# EAGLE board FLHSFYCIZ6BVKJ1 (EAGLE 7.6.0)
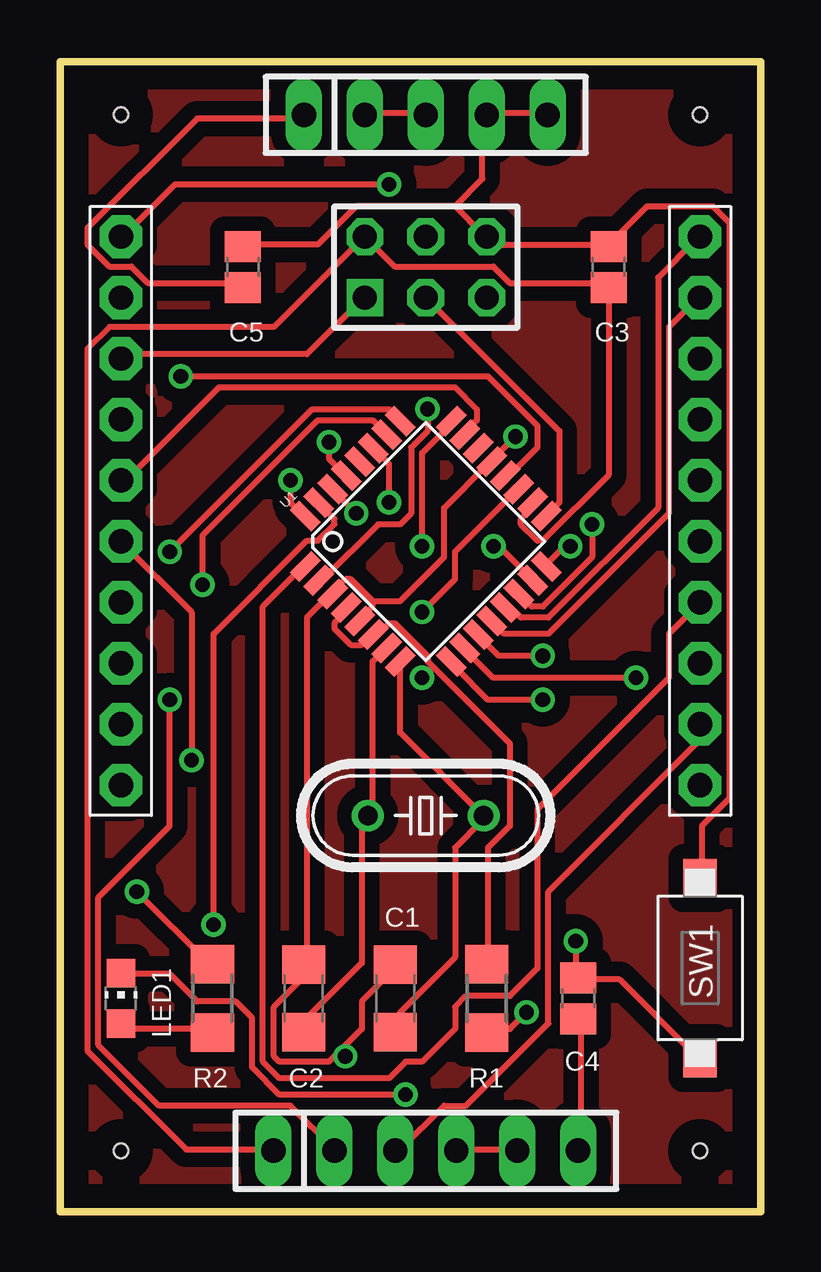
[diagram p0: board, top side]
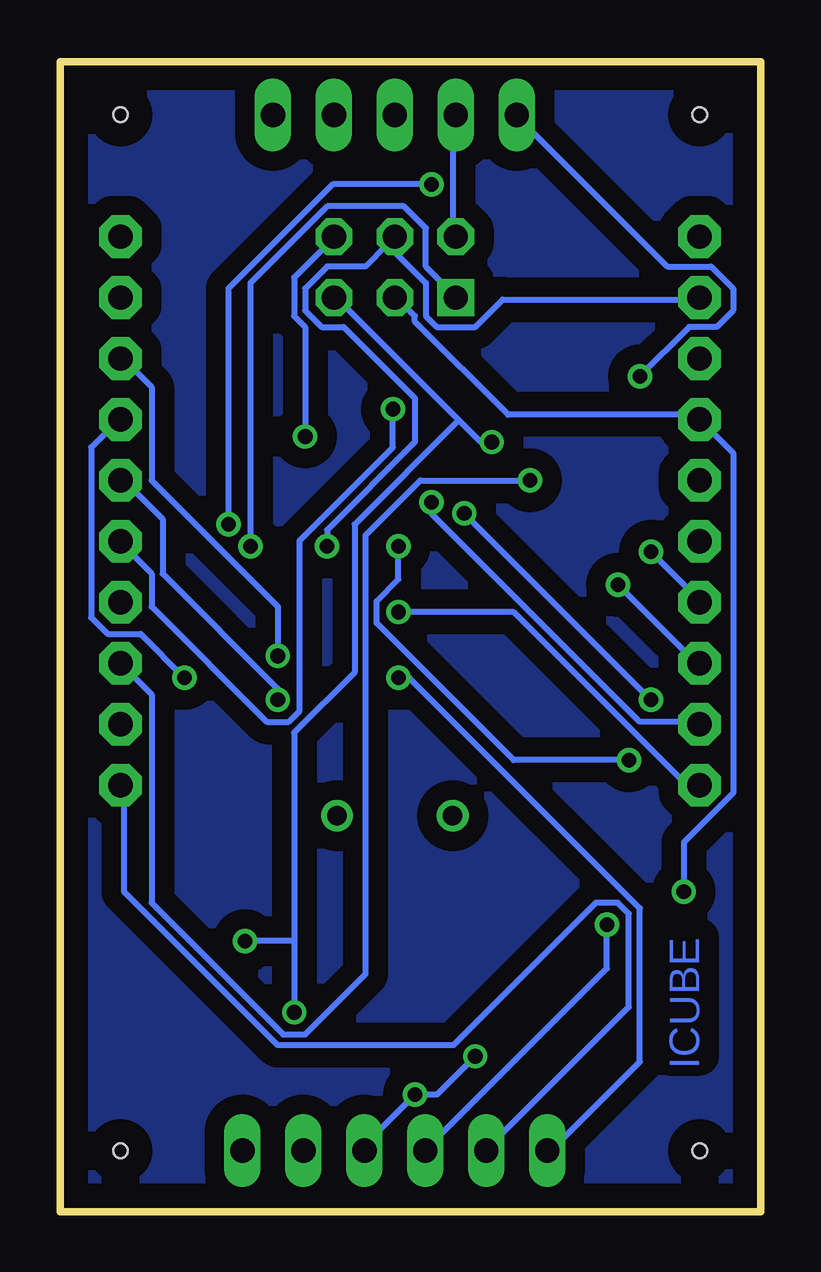
[diagram p1: board, bottom side, seen from below]

Size 29.19 x 47.93 mm. Coordinates in mm from the lower left corner, seen from the top.
Outline: 0,0 29.19,0 29.19,47.93 0,47.93 0,0
Copper layers (1*16): Top 0.035mm / dielectric 1.5mm / Bottom 0.035mm
Design rules "default": minimum track width 10mil, minimum drill 24mil, track to track 8mil, track to pad 8mil, pad to pad 8mil, via to via 8mil, smd to smd 8mil, copper to edge 40mil, drill to drill 8mil, minimum pad ring 10mil, minimum via ring 8mil, stop-mask expansion 4mil, vias tented up to drill 0mil, thermal gap 10mil
Holes 0.6 mm at 2.54,45.72 26.67,45.72 26.67,2.54 2.54,2.54

## Footprints (pad centres in the part's own frame; a part is rotated, then mirrored left to right if it is on the bottom)
C1206 = smd 1.6 x 1.8: 1 -1.4,0; 2 1.4,0
C0805 = smd 1.3 x 1.5: 1 -0.85,0; 2 0.85,0
SIP-100-6V = drill 1.016 long: 1 -6.35,0; 2 -3.81,0; 3 -1.27,0; 4 1.27,0; 5 3.81,0; 6 6.35,0
SIP-100-5V = drill 1.016 long: 1 -5.08,0; 2 -2.54,0; 3 0,0; 4 2.54,0; 5 5.08,0
AVR-ISP-6 = drill 1.016 square: 1 -2.54,-1.27 | drill 1.016 octagon: 2 -2.54,1.27; 3 0,-1.27; 4 0,1.27; 5 2.54,-1.27; 6 2.54,1.27
CHIP-LED0805 = smd 1.2 x 1.2: A 0,-1.05; C 0,1.05
HC49/S = drill 0.813: 1 -2.413,0; 2 2.413,0
R1206 = smd 1.6 x 1.803: 1 -1.422,0; 2 1.422,0
KSS-2EG4430 = smd 1.6 x 1.4: 1 -3.75,0; 2 3.75,0
TQFP32-08 = smd 1.27 x 0.559: 1 -4.293,2.8; 2 -4.293,2; 3 -4.293,1.2; 4 -4.293,0.4; 5 -4.293,-0.4; 6 -4.293,-1.2; 7 -4.293,-2; 8 -4.293,-2.8; 17 4.293,-2.8; 18 4.293,-2; 19 4.293,-1.2; 20 4.293,-0.4; 21 4.293,0.4; 22 4.293,1.2; 23 4.293,2; 24 4.293,2.8 | smd 0.559 x 1.27: 9 -2.8,-4.293; 10 -2,-4.293; 11 -1.2,-4.293; 12 -0.4,-4.293; 13 0.4,-4.293; 14 1.2,-4.293; 15 2,-4.293; 16 2.8,-4.293; 25 2.8,4.293; 26 2,4.293; 27 1.2,4.293; 28 0.4,4.293; 29 -0.4,4.293; 30 -1.2,4.293; 31 -2,4.293; 32 -2.8,4.293
1X10-BIG = drill 1.016 pad 1.778 octagon: 1 -11.43,0; 2 -8.89,0; 3 -6.35,0; 4 -3.81,0; 5 -1.27,0; 6 1.27,0; 7 3.81,0; 8 6.35,0; 9 8.89,0; 10 11.43,0

## Placement (x,y rotation side)
C1  22pF  [C1206]  13.97,8.89 90 top
C2  22pF  [C1206]  10.16,8.89 90 top
C3  0.1uF  [C0805]  22.86,39.37 90 top
C4  0.1uF  [C0805]  21.59,8.89 90 top
C5  0.1uF  [C0805]  7.62,39.37 90 top
CN1  [SIP-100-6V]  15.24,2.54 0 top
CN2  [SIP-100-5V]  15.24,45.72 0 top
JP1  AVR-ISP-6  [AVR-ISP-6]  15.24,39.37 0 top
LED1  Yellow  [CHIP-LED0805]  2.54,8.89 0 top
Q1  16MHz  [HC49/S]  15.24,16.51 180 top
R1  10K  [R1206]  17.78,8.89 90 top
R2  1K  [R1206]  6.35,8.89 90 top
SW1  KSS-2EG4430  [KSS-2EG4430]  26.67,10.16 270 top
U1  ATMEGA328  [TQFP32-08]  15.24,27.94 45 top
U$1  PINHD-1X10  [1X10-BIG]  26.67,29.21 90 top
U$2  PINHD-1X10  [1X10-BIG]  2.54,29.21 270 top

## Library data of the parts
C1-C5 LED1 R1 R2 U$1 U$2 = adafruit
CN1 CN2 = con-hdrs40
JP1 = atmel-1
Q1 = crystal
SW1 = buttons
U1 = thecustomgeek

## Nets
A0: U1.23 U$2.5
A1: U1.24 U$2.6
A2: U1.25 U$2.7
A3: U1.26 U$2.8
A4: U1.27 U$2.9
A5: U1.28
A6: U1.19 U$2.10
A7: U1.22
AREF: C5.1 CN2.1 U1.20
D0: CN1.2 U1.30 U$1.1
D1: CN1.3 U1.31 U$1.2
D2: U1.32 U$1.3
D3: U1.1 U$1.4
D4: U1.2 U$1.5
D5: U1.9 U$1.6
D6: U1.10 U$1.7
D7: U1.11 U$1.8
D8: U1.12 U$1.9
D9: U1.13 U$1.10
D10: U1.14 U$2.1
D11: JP1.4 U1.15 U$2.2
D12: JP1.1 U1.16 U$2.3
D13: JP1.3 R2.2 U1.17 U$2.4
GND: C1.2 C2.2 C3.2 C5.2 CN1.4 CN1.5 CN2.4 CN2.5 JP1.6 LED1.C SW1.1 U1.3 U1.5 U1.21
N$6: C4.1 CN1.6
N$43: C2.1 Q1.2 U1.7
N$44: C1.1 Q1.1 U1.8
N$50: LED1.A R2.1
RST: C4.2 JP1.5 R1.1 SW1.2 U1.29
VCC: C3.1 CN1.1 CN2.2 CN2.3 JP1.2 R1.2 U1.4 U1.6 U1.18

## Tracks (layer width: path | path; a pad name or v marks a point on that pad's centre or on a via)
A0
  Top 0.254: U1.23 16.92,32.54 17.37,32.99 17.37,33.45 16.46,34.37 6.63,34.37 2.74,30.48 U$2.5
A1  (via drill 0.61)
  Top 0.254: v15.09,27.74 15.09,31.62 16.23,32.77 U1.24 | v5.49,18.82 5.49,24.99 U$2.6
  Bottom 0.254: v15.09,27.74 15.09,26.37 16,25.45 16,24.54 10.29,18.82 v5.49,18.82
A2  (via drill 0.61)
  Top 0.254: v4.57,27.51 10.52,33.45 13.72,33.45 14.17,32.99 U1.25
  Bottom 0.254: v4.57,27.51 2.52,25.45 U$2.7
A3  (via drill 0.61)
  Top 0.254: v5.94,26.14 5.94,28.19 10.74,32.99 13.03,32.99 13.49,32.54 U1.26
  Bottom 0.254: v5.94,26.14 2.74,22.94 U$2.8
A4  (via drill 0.61)
  Top 0.254: v13.72,29.57 13.72,31.17 13.26,31.62 U1.27
  Bottom 0.254: v13.72,29.57 13.72,29.11 5.03,20.42 2.74,20.42 U$2.9
A6  (via drill 0.61)
  Top 0.254: v15.09,24.99 16.46,26.37 16.46,27.51 18.97,30.02 U1.19
  Bottom 0.254: v15.09,24.99 10.29,24.99 3.2,17.91 2.74,17.91 U$2.10
AREF  (via drill 0.61)
  Top 0.254: v5.03,34.82 17.83,34.82 19.89,32.77 19.89,31.85 18.75,30.71 U1.20 | C5.1 7.54,38.71 3.66,38.71 2.97,39.39 2.06,39.39 1.14,40.31 1.14,41 5.71,45.57 10.06,45.57 CN2.1
  Bottom 0.254: v5.03,34.82 2.97,36.88 1.83,36.88 1.14,37.57 1.14,38.48 2.06,39.39 3.89,39.39 10.06,45.57 CN2.1
D0  (via drill 0.61)
  Top 0.254: v12.34,29.11 11.43,30.02 U1.30 | v4.57,21.34 4.57,16.08 1.6,13.11 1.6,6.93 4.12,4.42 9.6,4.42 11.43,2.59 CN1.2
  Bottom 0.254: v4.57,21.34 v12.34,29.11 | U$1.1 26.52,17.68 26.52,13.33 20.12,6.93 12.8,6.93 6.86,12.88 5.94,12.88 5.49,12.42 5.49,8.53 11.43,2.59 CN1.2
D1  (via drill 0.61)
  Top 0.254: v6.4,11.96 6.4,24.08 10.29,27.96 10.74,27.96 11.43,28.65 11.43,28.88 10.97,29.34 U1.31 | U$1.2 26.52,20.19 26.52,19.51 20.34,13.33 20.34,7.85 16.92,4.42 16,4.42 14.17,2.59 CN1.3
  Bottom 0.254: v6.4,11.96 6.4,10.13 13.95,2.59 CN1.3
D2  (via drill 0.61)
  Top 0.254: v9.6,30.48 9.6,29.57 10.06,29.11 U1.32
  Bottom 0.254: v9.6,30.48 14.17,30.48 16.46,28.19 16.46,9.91 18.97,7.39 19.89,7.39 25.38,12.88 25.38,21.57 U$1.3
D3
  Top 0.254: U1.1 10.06,26.82 8.46,25.22 8.46,6.25 9.14,5.56 13.72,5.56 14.4,6.25 15.09,6.25 16.46,7.62 16.46,8.53 16.92,8.99 18.75,8.99 19.89,10.13 19.89,16.76 25.38,22.25 25.38,24.08 26.52,25.22 U$1.4
D4  (via drill 0.61)
  Top 0.254: v15.32,33.45 15.32,32.54 14.63,31.85 14.63,29.11 14.17,28.65 13.26,28.65 10.97,26.37 U1.2
  Bottom 0.254: v15.32,33.45 15.32,31.85 19.2,27.96 19.2,20.88 19.66,20.42 20.57,20.42 25.38,25.22 25.38,26.59 26.52,27.74 U$1.5
D5  (via drill 0.61)
  Top 0.254: v20.12,21.34 17.83,21.34 16.46,22.71 U1.9
  Bottom 0.254: v20.12,21.34 20.12,21.79 24.92,26.59 24.92,28.88 26.52,30.48 U$1.6
D6  (via drill 0.61)
  Top 0.254: v24,22.25 18.06,22.25 16.92,23.39 U1.10
  Bottom 0.254: v24,22.25 25.83,24.08 27.2,24.08 27.89,24.77 27.89,31.85 26.75,32.99 U$1.7
D7  (via drill 0.61)
  Top 0.254: v20.12,23.17 18.29,23.17 17.6,23.85 U1.11
  Bottom 0.254: v20.12,23.17 20.12,25.22 25.38,30.48 25.38,34.37 26.52,35.51 U$1.8
D8
  Top 0.254: U1.12 18.06,24.54 18.52,24.08 20.34,24.08 25.38,29.11 25.38,36.88 26.52,38.02 U$1.9
D9
  Top 0.254: U1.13 18.75,24.99 18.97,24.99 19.2,24.77 20.34,24.77 24.92,29.34 24.92,38.94 26.52,40.54 U$1.10
D10  (via drill 0.61)
  Top 0.254: v22.17,28.65 22.17,27.28 20.12,25.22 19.66,25.22 19.2,25.68 U1.14 | v13.72,42.82 4.8,42.82 2.74,40.77 U$2.1
  Bottom 0.254: v22.17,28.65 22.17,38.48 17.83,42.82 v13.72,42.82
D11  (via drill 0.61)
  Top 0.254: v18.06,27.74 18.29,27.74 19.66,26.37 U1.15
  Bottom 0.254: v18.06,27.74 18.06,28.42 14.4,32.08 14.4,33.91 17.37,36.88 18.29,36.88 18.97,37.57 18.97,38.48 18.06,39.39 16.46,39.39 15.54,40.31 | 15.54,40.31 15.32,40.54 JP1.4 15.54,40.31 | 15.54,40.31 13.95,38.71 13.95,37.34 13.49,36.88 11.89,36.88 10.74,38.02 2.74,38.02 U$2.2
D12  (via drill 0.61)
  Top 0.254: v21.26,27.74 21.03,27.74 20.34,27.05 U1.16 | U$2.3 2.74,35.74 10.29,35.74 12.57,38.02 JP1.1
  Bottom 0.254: v21.26,27.74 21.26,38.71 18.06,41.91 14.86,41.91 13.95,41 13.95,39.39 12.8,38.25 JP1.1
D13  (via drill 0.61)
  Top 0.254: JP1.3 20.8,32.54 20.8,29.57 20.34,29.11 U1.17 | v3.2,13.33 6.17,10.36 R2.2
  Bottom 0.254: v3.2,13.33 3.2,15.39 1.14,17.45 1.14,31.62 U$2.4 2.74,33.22 10.52,33.22 14.4,37.11 14.4,37.34 15.09,38.02 JP1.3
GND  (via drill 0.61)
  Top 0.254: v14.4,4.88 9.14,4.88 8,6.02 8,8.08 7.32,8.76 5.71,8.76 4.57,9.91 2.74,9.91 LED1.C | CN1.5 18.97,2.59 16.69,2.59 CN1.4 | 11.66,6.71 12.57,7.62 12.57,8.76 13.95,10.13 C1.2 | 11.66,6.71 11.2,6.25 9.14,6.25 8.91,6.48 8.91,8.53 10.06,9.68 10.06,10.13 C2.2 10.29,10.36 10.29,24.77 11.2,25.68 U1.3 11.43,25.91 11.89,26.37 12.12,26.37 13.03,25.45 | 13.03,25.45 13.03,25.22 12.57,24.77 U1.5 | 13.03,25.45 14.17,25.45 16,27.28 16,29.34 17.83,31.17 U1.21 18.06,31.39 v18.97,32.31 | 11.66,6.71 v11.89,6.48 | CN2.5 20.12,45.8 17.83,45.8 CN2.4 17.6,45.57 17.6,43.05 16.46,41.91 | 16.46,41.91 12.34,41.91 10.74,40.31 7.77,40.31 C5.2 | 16.46,41.91 17.6,40.77 JP1.6 17.83,40.54 18.06,40.31 22.86,40.31 | 22.86,40.31 24.46,41.91 27.2,41.91 27.89,41.22 27.89,17.22 26.75,16.08 26.75,14.02 SW1.1 | 22.86,40.31 C3.2
  Bottom 0.254: CN1.4 16.69,2.59 v14.4,4.88 13.49,4.88 v11.89,6.48 | v18.97,32.31 18.97,36.88 19.43,37.34 19.43,38.94 17.83,40.54 JP1.6
N$1
  pour Top (isolate 0.61): 0,48.26 29.21,48.26 29.21,0 0,0
N$2
  pour Bottom (isolate 0.813): 0,48.26 29.21,48.26 29.21,0 0,0 0,1.27
N$6
  Top 0.254: C4.1 21.72,7.85 21.72,2.59 CN1.6
N$43
  Top 0.254: U1.7 13.49,23.39 13.03,22.94 13.03,16.54 Q1.2 12.8,16.31 12.57,16.08 12.57,10.36 10.29,8.08 10.29,7.62 C2.1
N$44
  Top 0.254: U1.8 14.17,22.71 14.17,19.96 17.6,16.54 Q1.1 17.6,16.31 16.46,15.16 16.46,10.59 14.17,8.31 14.17,7.62 C1.1
N$50
  Top 0.254: LED1.A 2.74,7.62 6.17,7.62 R2.1
RST  (via drill 0.61)
  Top 0.254: SW1.2 26.52,6.48 23.32,9.68 21.72,9.68 C4.2 21.49,9.91 v21.49,11.28 | v11.2,32.08 11.2,31.39 11.89,30.71 U1.29 | v19.43,8.31 18.75,7.62 17.83,7.62 R1.1
  Bottom 0.254: v11.2,32.08 11.66,32.08 12.57,32.99 | 12.57,32.99 17.6,38.02 JP1.5 | 19.43,11.28 19.43,19.96 16.92,22.48 16.92,28.65 12.57,32.99 | 19.43,11.28 v19.43,8.31 | 19.43,11.28 v21.49,11.28
VCC  (via drill 0.61)
  Top 0.254: U1.4 11.89,24.99 11.43,24.54 11.43,24.31 12.12,23.62 12.57,23.62 12.8,23.85 13.03,23.85 U1.6 13.26,24.08 13.72,24.54 13.95,24.54 15.32,23.17 15.32,22.94 15.54,22.71 | 15.54,22.71 18.75,19.51 18.75,16.08 17.83,15.16 17.83,10.36 R1.2 | U1.18 19.66,29.34 19.2,28.88 19.2,28.65 19.89,27.96 20.12,27.96 22.86,30.71 C3.1 22.86,38.71 18.75,38.71 18.06,39.39 13.95,39.39 JP1.2 12.57,40.54 8.91,36.88 2.06,36.88 1.14,35.97 1.14,6.71 5.26,2.59 8.69,2.59 CN1.1 | CN2.2 12.8,45.8 15.09,45.8 CN2.3 | v15.09,22.25 15.54,22.71
  Bottom 0.254: CN2.2 12.8,45.57 12.8,40.77 JP1.2 | v15.09,22.25 14.63,22.25 5.03,12.65 5.03,6.25 8.69,2.59 CN1.1

## Text on the board
Bottom: ICUBE